# Altium PCB AltiumSTM32_PCB.PcbDoc
Units mm, origin at the board's own origin, x right, y up, seen from the top; angles counter-clockwise.
Board outline 35.25 x 34.25 mm, 4 copper layers (L1 (SIGNAL), L2 (GND), L3 (GND), L4 (SIGNAL)), stack 1.57 mm thick; 35 components, 28 nets, 168 pads, 119 vias.
Unrouted connection lines stored in the file: 10.
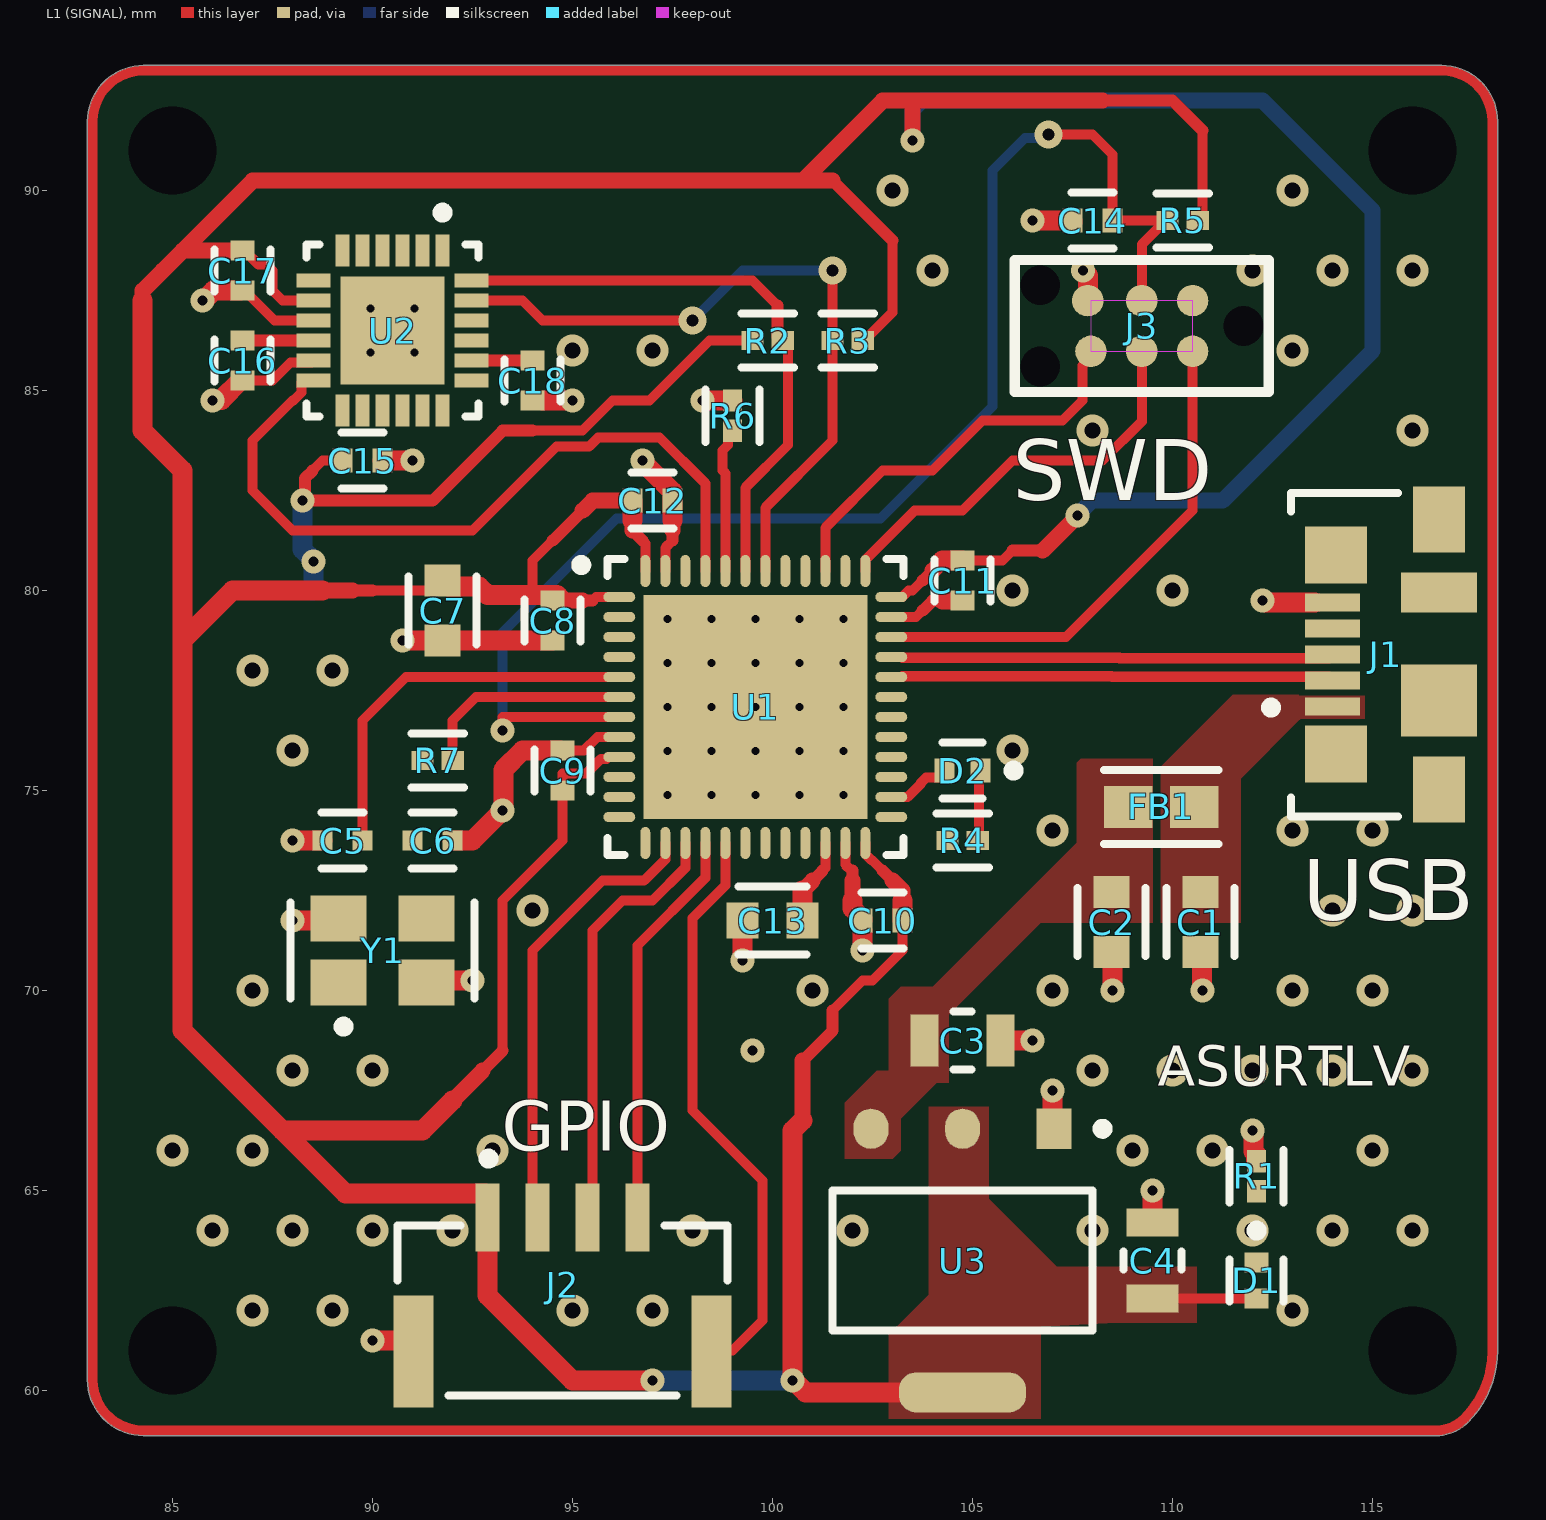
[diagram p0: L1 (SIGNAL) view]
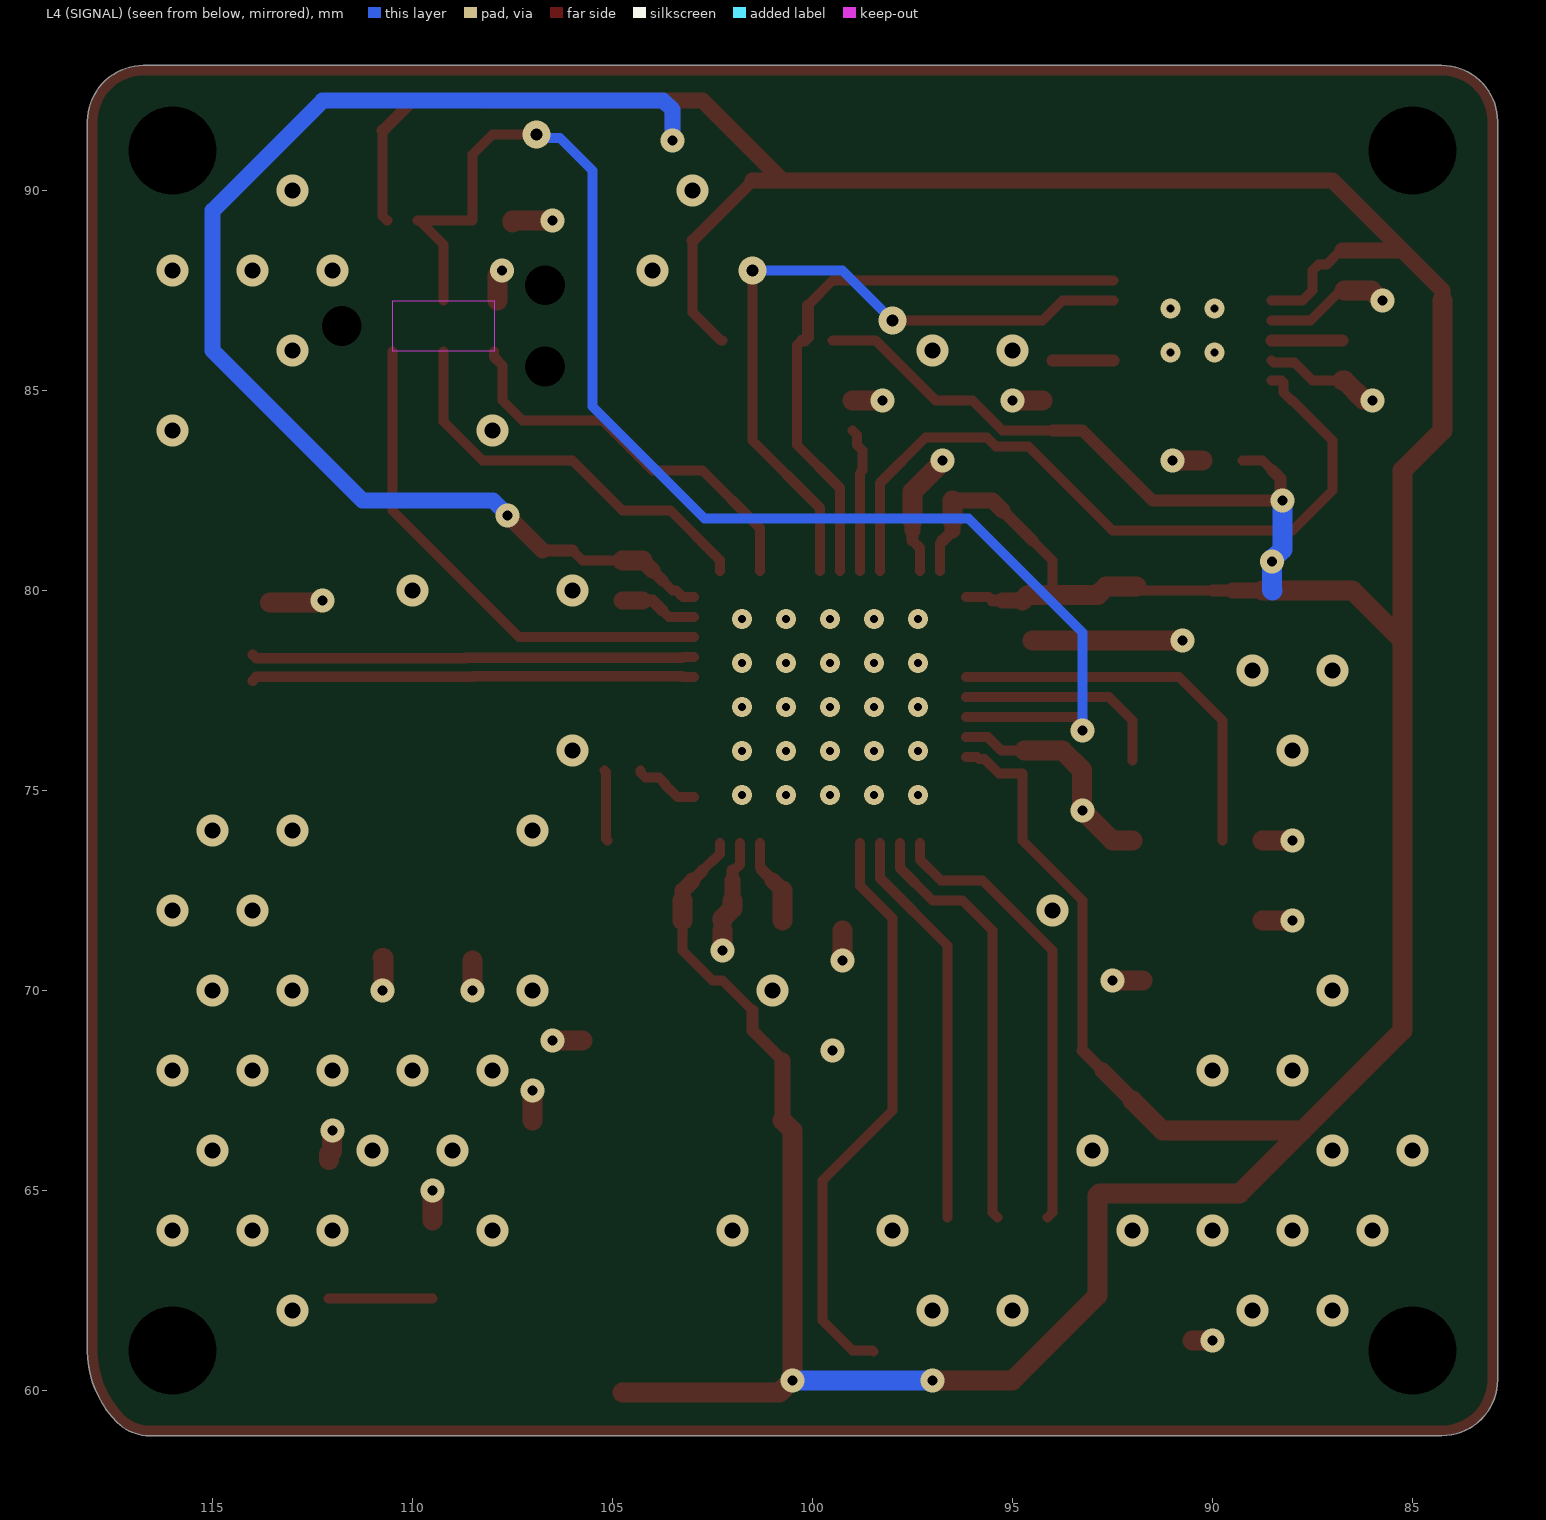
[diagram p1: L4 (SIGNAL) view, seen from below]
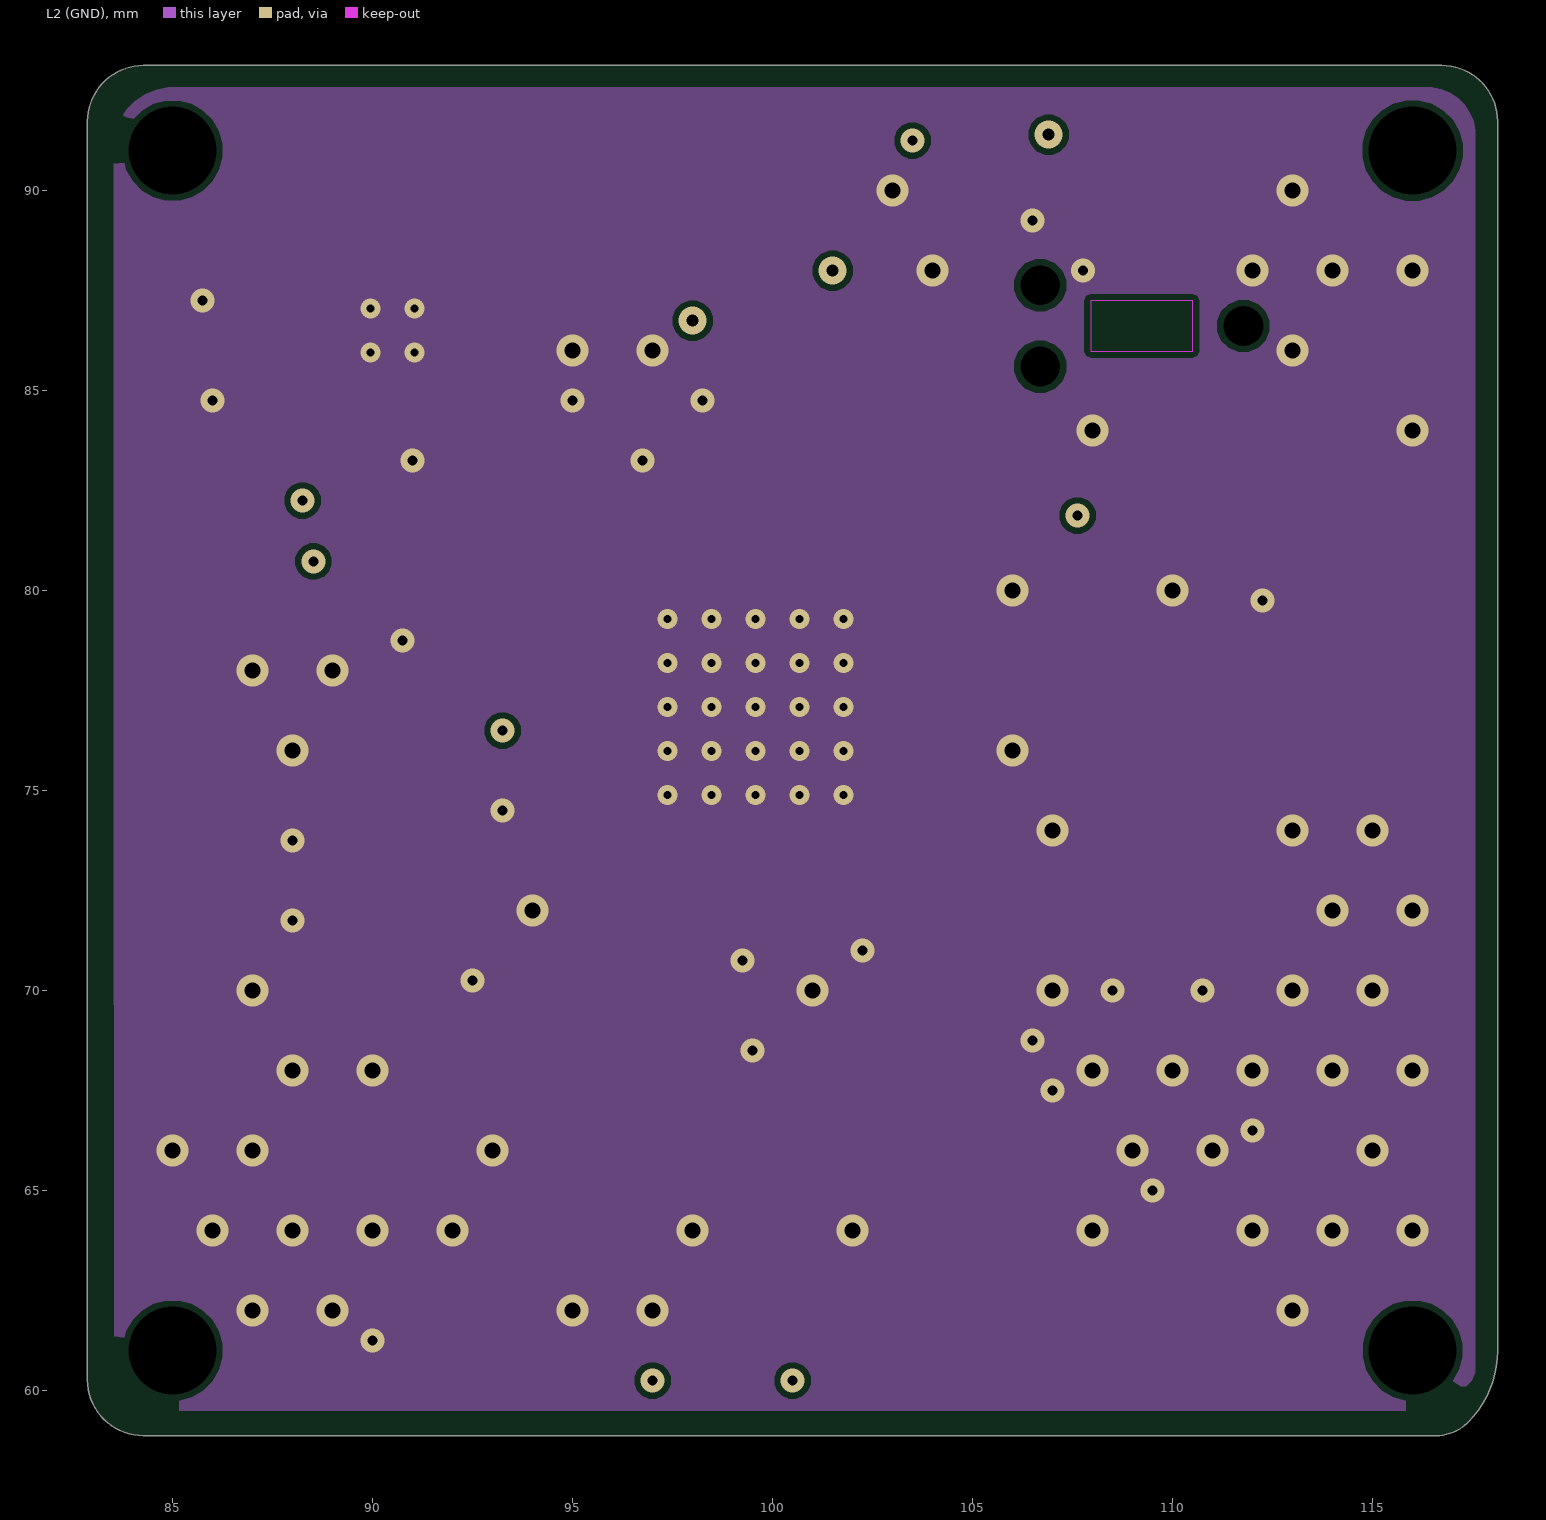
[diagram p2: L2 (GND)]
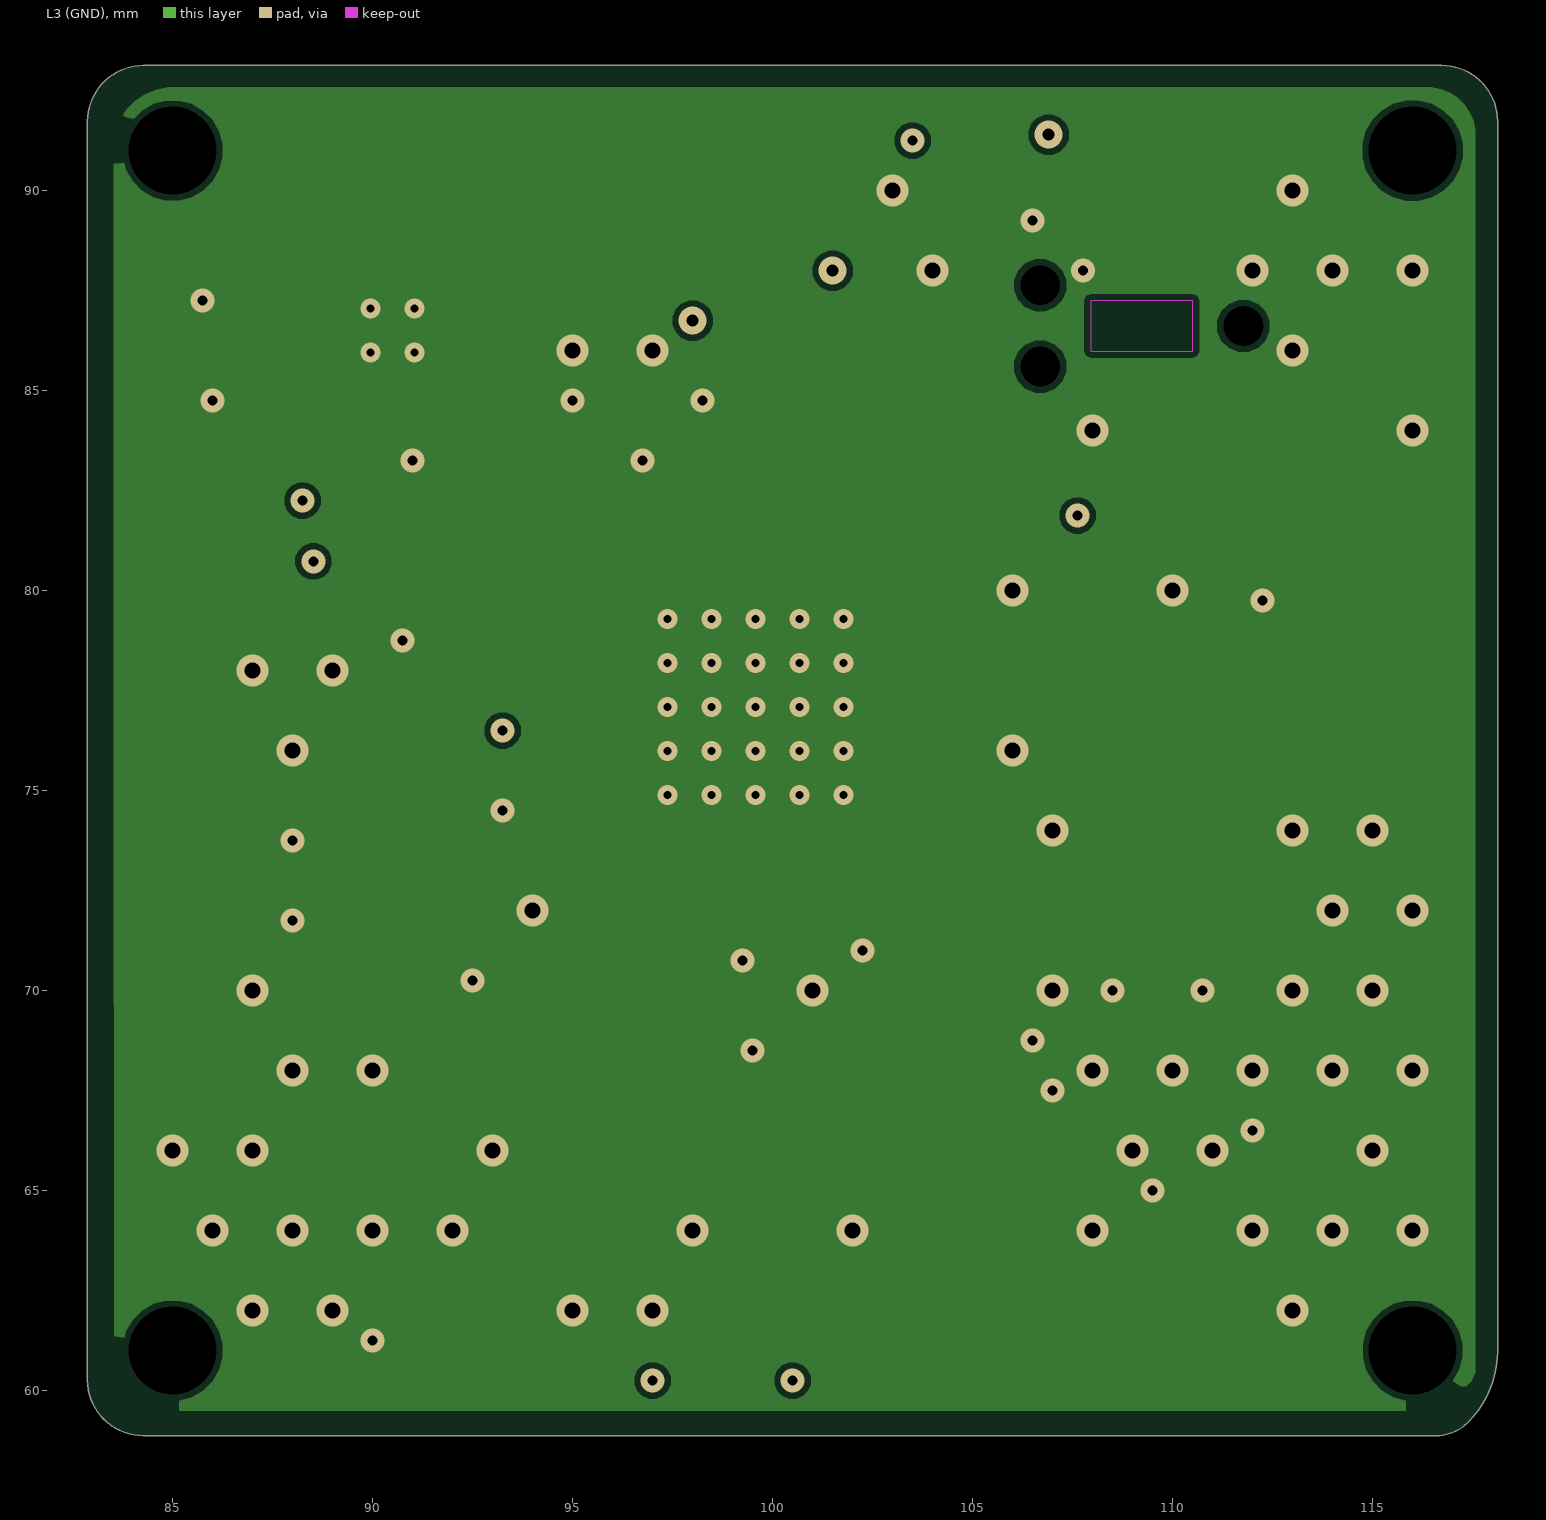
[diagram p3: L3 (GND)]
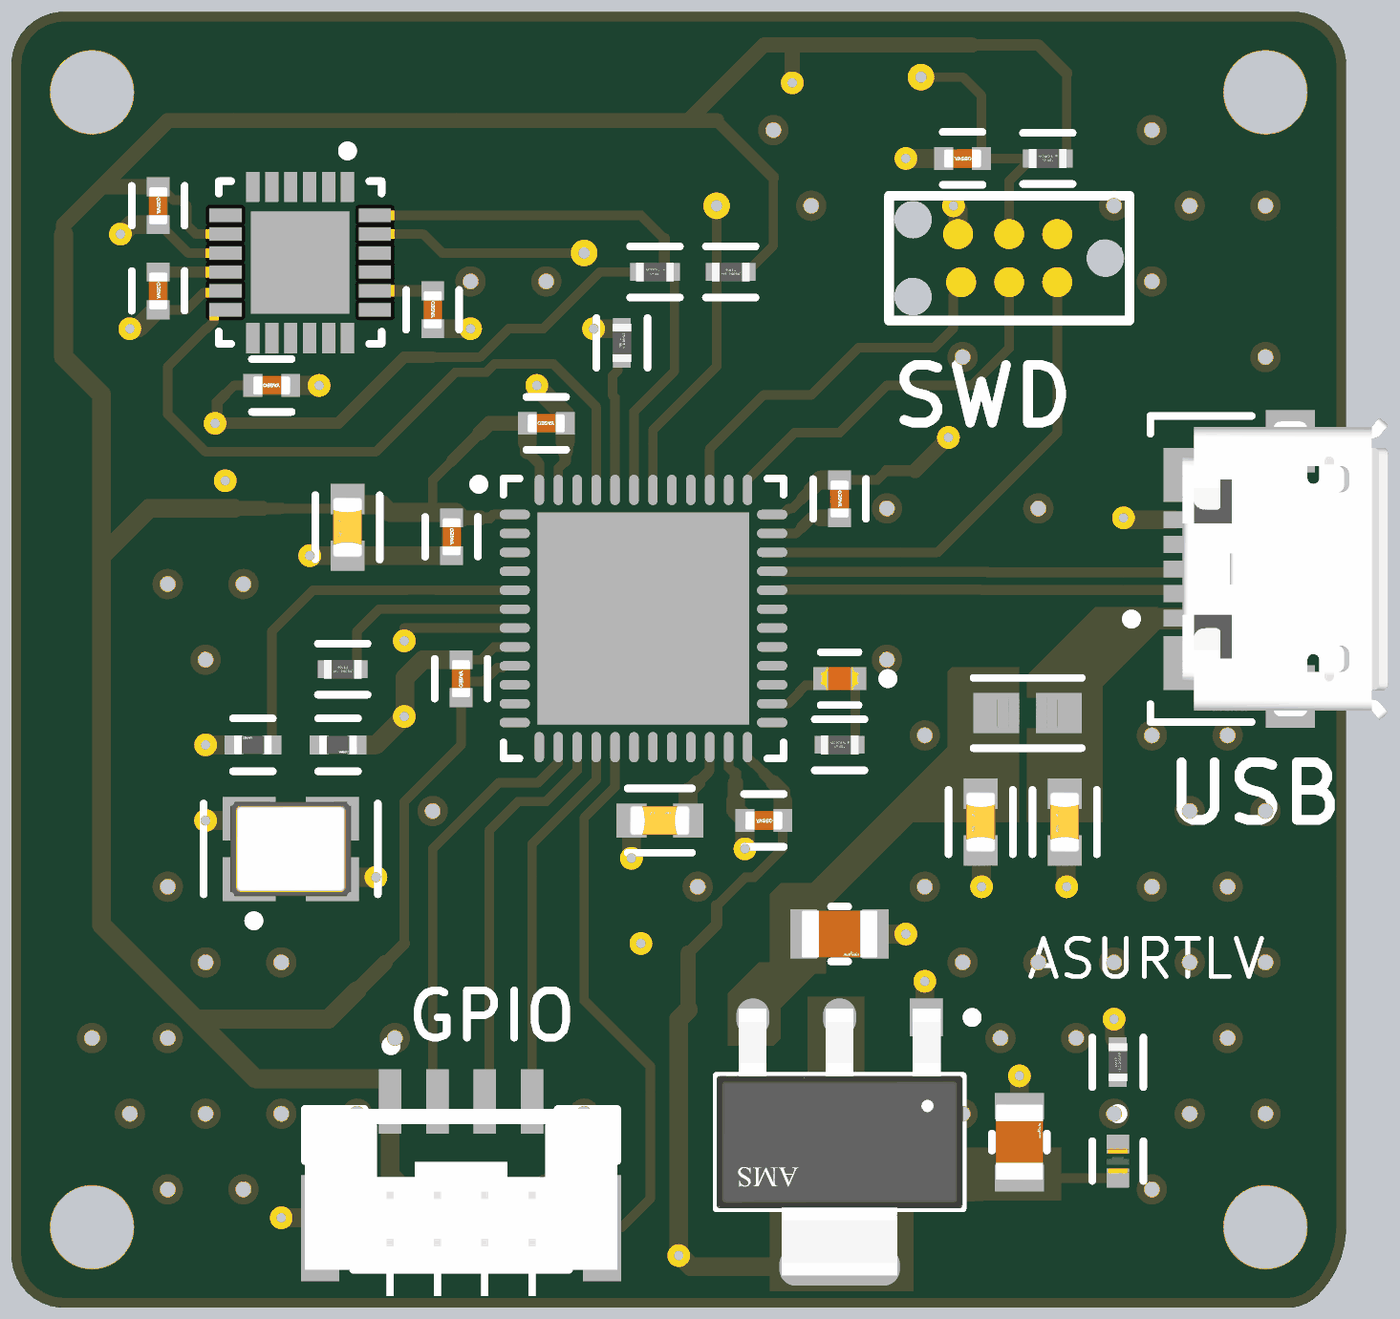
[diagram p4: 3D render of the assembled board from above, using the file's embedded part models]

## Layer stack, top to bottom
Top Solder: solder mask 0.0254, SM-001, Dk 4
L1 (SIGNAL): signal copper 0.035
Dielectric 1: prepreg 0.2, PP-017, Dk 4.6
L2 (GND): signal copper 0.0175
Dielectric 3: core 1.065, Core-039, Dk 4.6
L3 (GND): signal copper 0.0175
Dielectric 5: prepreg 0.2, PP-017, Dk 4.6
L4 (SIGNAL): signal copper 0.035
Bottom Solder: solder mask 0.0254, SM-001, Dk 4

## Board outline
82.873,60.27 82.873,91.73 cw(c84.27,91.73) 84.27,93.127 85,93.127 85.001,93.127 116,93.127 116.73,93.127 cw(c116.73,91.73) 118.127,91.73 118.127,61 cw(c115.586,61) 117.383,59.203 cw(c116.586,60) 116.586,58.873 84.27,58.873 84.269,58.873 cw(c84.27,60.27)

## Design rules (kind name [scope] priority, off if disabled: settings)
Clearance [All] p1: gap=0.15 ignorepadtopadclearanceinfootprint=FALSE
DiffPairsRouting [All] p1: maxlimit=0.254 minlimit=0.203 mostfreqgap=0.254 toplayer_maxgap=0.203 toplayer_prefgap=0.203 toplayer_minwidth=0.26 toplayer_maxwidth=0.26 toplayer_prefwidth=0.26 bottomlayer_maxgap=0.203 bottomlayer_prefgap=0.203 bottomlayer_minwidth=0.26 bottomlayer_maxwidth=0.26 bottomlayer_prefwidth=0.26 impedanceprofiledriven=TRUE impedanceprofileid={91940707-6BF8-4141-95DC-8DDD4F4BC59A} impedanceprofilevalue=90.000000 maxuncoupledlength=12.7
PolygonConnect [All] p1: connectstyle=Direct reliefconductorwidth=0.254 reliefentries=4 polygonreliefangle="90 Angle" airgapwidth=0.254
RoutingVias [All] p1: holewidth=0.3 width=0.7 viastyle="Through Hole" minholewidth=0.25 minwidth=0.55 maxholewidth=0.4 maxwidth=0.9
SolderMaskExpansion [All] p1: expansion=0 istentingtop=FALSE
SupplyNets "Schematic Supply Nets_4" [InNet('3V3')] p1: voltage=0.000
SupplyNets "Schematic Supply Nets_3" [InNet('VBUS')] p2: voltage=0.000
SupplyNets "Schematic Supply Nets_2" [InNet('+3V3')] p3: voltage=0.000
SupplyNets "Schematic Supply Nets_1" [InNet('GND')] p4: voltage=0.000
SupplyNets "Schematic Supply Nets" [InNet('+5V')] p5: voltage=0.000
UnRoutedNet [All] p1: checkbadconnections=TRUE
Width [All] p1: maxlimit=1 minlimit=0.2 preferedwidth=0.3 midlayer1_minwidth=0.254 midlayer1_maxwidth=0.254 midlayer1_prefwidth=0.254 midlayer2_minwidth=0.254 midlayer2_maxwidth=0.254 midlayer2_prefwidth=0.254 minimp=50.000000 maximp=50.000000 favimp=50.000000
28 further rules are at their usual default settings.

## Classes and differential pairs
differential pair class DIFF_USB: USB_D
differential pair USB_D: +USB_D_P -USB_D_N

## Components (designator, comment, footprint, x,y, rotation, side; value= is the part's Value field where it differs from the comment)
C1 "2u2" FP-CC0603-DA-MFG 110.696,71.709 r270 top value="2.2 uF"
C2 "2u2" FP-CC0603-DA-MFG 108.477,71.709 r270 top value="2.2 uF"
C3 "22u" FP-GRT21B-0_2-MFG 104.75,68.75 r0 top
C4 "22u" FP-GRT21B-0_2-MFG 109.5,63.25 r90 top
C5 "8p" FP-CC0402-MFG 89.25,73.75 r180 top value=8pF
C6 "8p" FP-CC0402-MFG 91.5,73.75 r0 top value=8pF
C7 "2u2" FP-CC0603-DA-MFG 91.75,79.5 r270 top value="2.2 uF"
C8 "100n" FP-CC0402-0_05-0_55-L2_0-MFG 94.5,79.25 r90 top
C9 "100n" FP-CC0402-0_05-0_55-L2_0-MFG 94.75,75.5 r270 top
C10 "100n" FP-CC0402-0_05-0_55-L2_0-MFG 102.75,71.75 r0 top
C11 "100n" FP-CC0402-0_05-0_55-L2_0-MFG 104.75,80.25 r90 top
C12 "100n" FP-CC0402-0_05-0_55-L2_0-MFG 97,82.25 r180 top
C13 "2u2" FP-CC0603-DA-MFG 100,71.75 r180 top value="2.2 uF"
C14 "100n" FP-CC0402-0_05-0_55-L2_0-MFG 108,89.25 r0 top
C15 "100n" FP-CC0402-0_05-0_55-L2_0-MFG 89.75,83.25 r180 top
C16 "100n" FP-CC0402-0_05-0_55-L2_0-MFG 86.75,85.75 r90 top
C17 "10n" FP-CC0402-0_05-0_55-L2_0-MFG 86.75,88 r90 top
C18 "2n2" FP-CC0402-0_05-0_55-L2_0-MFG 94,85.25 r90 top
D1 "GREEN" FP-SML-P1-MFG 112.1,62.75 r270 top
D2 "RED" FP-SML-P1-MFG 104.75,75.5 r180 top
FB1 "120R" FP-MPZ1608-0_6-IPC_A 109.717,74.591 r180 top
J1 "473460001" FP-473460001-MFG 116.31,78.4 r90 top
J2 "BM04B-GHS-TBT(LF)(SN)" FP-BM04B-GHS-TBT_LF_SN-MFG 94.75,62 r180 top
J3 "TC2030-IDC-NL" TC2030-IDC-NL 111.77,86.615 r180 top
R1 "1k" FP-CRGCQ0402-IPC_C 112.1,65.36 r90 top value=10KΩ
R2 "2k2" FP-CRGCQ0402-IPC_C 99.874,86.25 r180 top value=10KΩ
R3 "2k2" FP-CRGCQ0402-IPC_C 101.874,86.25 r0 top value=10KΩ
R4 "1k" FP-CRGCQ0402-IPC_C 104.75,73.75 r180 top value=10KΩ
R5 "10k" FP-CRGCQ0402-IPC_C 110.25,89.25 r180 top value=10KΩ
R6 "10k" FP-CRGCQ0402-IPC_C 99,84.376 r90 top value=10KΩ
R7 "0R" FP-CRGCQ0402-IPC_C 91.624,75.75 r0 top value=10KΩ
U1 "STM32F411CEU6" STM-UFQFPN48_L 99.568,77.089 r0 top
U2 "MPU-6050" IS-QFN-24_V 90.5,86.5 r270 top
U3 "AMS1117-3.3" FP-AMS1117-IPC_C 104.75,63.25 r270 top
Y1 "24MHz" FP-TSX-3225-MFG 90.25,71 r0 top

## Footprints (in the part's own frame and the unit in brackets; to place one, negate y for a bottom-side part, rotate by r counter-clockwise, add the part's x,y. Pads: shape width x height; smd on the part's side, far side on the other; paste and mask are expansions set on the pad)
FP-473460001-MFG [mm]
  rect 0.45x1.38 smd paste+0 mask+0: 1(-1.3,2.31) 2(-0.65,2.31) 3(0,2.31) 4(0.65,2.31) 5(1.3,2.31)
  rect 1.425x1.55 smd paste+0 mask+0: 6(-2.488,2.225) 7(2.488,2.225)
  rect 1.65x1.3 smd paste+0 mask+0: 8(-3.375,-0.35) 11(3.375,-0.35)
  rect 1.8x1.9 smd paste+0 mask+0: 9(-1.15,-0.35)
  rect 1x1.9 smd paste+0 mask+0: 10(1.55,-0.35)
  silkscreen extent -4.05,0.67 4.05,3.97, body extent -4.3,-2.48 4.3,3.45, height 0.25
FP-AMS1117-IPC_C [mm]
  rect 1.004x0.872 smd paste+0 mask+0: 1(-3.295,2.29)
  rrect100% 1.004x0.872 smd paste+0 mask+0: 2(-3.295,0) 3(-3.295,-2.29)
  rrect87% 1.004x3.182 smd paste+0 mask+0: 4(3.295,0)
  silkscreen extent -3.42,-3.25 1.75,3.63, body extent -3.9,-3.35 3.9,3.35, height 0.25
FP-BM04B-GHS-TBT_LF_SN-MFG [mm]
  rect 0.6x1.7 smd paste+0 mask+0: 1(1.875,-2.325) 2(0.625,-2.325) 3(-0.625,-2.325) 4(-1.875,-2.325)
  rect 1x2.8 smd paste+0 mask+0: 5(-3.725,1.025) 6(3.725,1.025)
  silkscreen extent -4.13,-3.92 4.13,2.12, body extent -4.13,-2.12 4.13,2.83, height 4.2
FP-CC0402-0_05-0_55-L2_0-MFG [mm]
  rect 0.5x0.6 smd paste+0 mask+0: 1(-0.5,0) 2(0.5,0)
  silkscreen extent -0.53,-0.7 0.53,0.7, body extent -0.85,-0.4 0.85,0.4, height 0.25
FP-CC0402-MFG [mm]
  rect 0.5x0.5 smd paste+0 mask+0: 1(-0.5,0) 2(0.5,0)
  silkscreen extent -0.53,-0.7 0.53,0.7, body extent -0.87,-0.48 0.87,0.48, height 0.25
FP-CC0603-DA-MFG [mm]
  rect 0.8x0.9 smd paste+0 mask+0: 1(-0.75,0) 2(0.75,0)
  silkscreen extent -0.85,-0.85 0.85,0.85, body extent -1.35,-0.75 1.35,0.75, height 0.25
FP-CRGCQ0402-IPC_C [mm]
  rect 0.56x0.472 smd paste+0 mask+0: 1(-0.376,0) 2(0.376,0)
  silkscreen extent -0.66,-0.67 0.66,0.67, body extent -0.76,-0.38 0.76,0.38, height 0.25
FP-GRT21B-0_2-MFG [mm]
  rect 0.7x1.3 smd paste+0 mask+0: 1(-0.95,0) 2(0.95,0)
  silkscreen extent -0.23,-0.72 0.23,0.72, body extent -1.4,-0.82 1.4,0.82, height 0.25
FP-MPZ1608-0_6-IPC_A [mm]
  rect 1.206x1.058 smd paste+0 mask+0: 1(-0.826,0) 2(0.826,0)
  silkscreen extent -1.43,-0.93 1.43,0.93, body extent -1.93,-1.03 1.93,1.03, height 0.25
FP-SML-P1-MFG [mm]
  rect 0.5x0.6 smd paste+0 mask+0: 1(-0.45,0) 2(0.45,0)
  silkscreen extent -1.37,-0.67 0.53,0.67, body extent -0.8,-0.43 0.8,0.43, height 0.25
FP-TSX-3225-MFG [mm]
  rect 1.4x1.15 smd paste+0 mask+0: 1(-1.1,-0.8) 2(1.1,-0.8) 3(1.1,0.8) 4(-1.1,0.8)
  silkscreen extent -2.3,-2.02 2.3,1.2, body extent -1.9,-1.48 1.9,1.48, height 0.25
IS-QFN-24_V [mm] "QFN, 24-Leads, Body 4x4mm, Pitch 0.5mm, Thermal Pad 2.7x2.6mm"
  rect 0.8x0.35 smd: 1(-2,1.25) 2(-2,0.75) 3(-2,0.25) 4(-2,-0.25) 5(-2,-0.75) 6(-2,-1.25) 13(2,-1.25) 14(2,-0.75) 15(2,-0.25) 16(2,0.25) 17(2,0.75) 18(2,1.25)
  rect 0.35x0.85 smd mask+0.102: 7(-1.25,-1.975) 8(-0.75,-1.975) 9(-0.25,-1.975) 10(0.25,-1.975) 11(0.75,-1.975) 12(1.25,-1.975) 19(1.25,1.975) 20(0.75,1.975) 21(0.25,1.975) 22(-0.25,1.975) 23(-0.75,1.975) 24(-1.25,1.975)
  rect 2.7x2.6 smd: 25(0,0)
  silkscreen extent -3.07,-2.15 2.15,2.15, body extent -2,-2 2,2, height 0.95
STM-UFQFPN48_L [mm] "QFN, 48-Leads, Body 7.1x7.1mm, Pitch 0.5mm, Thermal Pad 5.6x5.6mm, IPC High Density"
  oval 0.8x0.25 smd: 1(-3.4,2.75) 2(-3.4,2.25) 3(-3.4,1.75) 4(-3.4,1.25) 5(-3.4,0.75) 6(-3.4,0.25) 7(-3.4,-0.25) 8(-3.4,-0.75) 9(-3.4,-1.25) 10(-3.4,-1.75) 11(-3.4,-2.25) 12(-3.4,-2.75) 25(3.4,-2.75) 26(3.4,-2.25) 27(3.4,-1.75) 28(3.4,-1.25) 29(3.4,-0.75) 30(3.4,-0.25) 31(3.4,0.25) 32(3.4,0.75) 33(3.4,1.25) 34(3.4,1.75) 35(3.4,2.25) 36(3.4,2.75)
  oval 0.25x0.8 smd: 13(-2.75,-3.4) 14(-2.25,-3.4) 15(-1.75,-3.4) 16(-1.25,-3.4) 17(-0.75,-3.4) 18(-0.25,-3.4) 19(0.25,-3.4) 20(0.75,-3.4) 21(1.25,-3.4) 22(1.75,-3.4) 23(2.25,-3.4) 24(2.75,-3.4) 37(2.75,3.4) 38(2.25,3.4) 39(1.75,3.4) 40(1.25,3.4) 41(0.75,3.4) 42(0.25,3.4) 43(-0.25,3.4) 44(-0.75,3.4) 45(-1.25,3.4) 46(-1.75,3.4) 47(-2.25,3.4) 48(-2.75,3.4)
  rect 5.6x5.6 smd: 49(0,0)
  silkscreen extent -4.47,-3.7 3.7,3.7, body extent -3.55,-3.55 3.55,3.55, height 0.6
TC2030-IDC-NL [mm] "Tag-Connect 6-Pin with No Legs (PN# TC2030-IDC-NL)"
  round 0.9 hole 0.995 unplated: 0(0,0) 0(5.08,-1.016) 0(5.08,1.016)
  round 0.79 smd paste-0.39: 1(1.27,-0.635) 2(1.27,0.635) 3(2.54,-0.635) 4(2.54,0.635) 5(3.89,-0.635) 6(3.81,0.635)
  Keep-Out Layer region: 1.27,-0.635 3.81,-0.635 3.81,0.635 1.27,0.635
  silkscreen extent -0.64,-1.65 5.71,1.65

## Part data
C1 C2 C7 C13: library part CMP-03422-001238-1, "CAP CER 2.2UF 16V X7R 0603", Capacitance="2.2 uF", Manufacturer=YAGEO, Manufacturer Part Number=CC0603KRX7R7BB225, Package=CC0603-DA, Temperature="-55°C to +125°C", Temperature Characteristic=X7R, Temperature Coefficient=15%, Temperature Range High=+125°C, Temperature Range Low=-55°C, Tolerance=0.1, Voltage="16 V", Automotive=No, Category=Cap, ComponentLink2Description=Datasheet, ComponentLink2URL=http://www.yageo.com/documents/recent/UPY-GPHC_X7R_6.3V-to-50V_18.pdf, Device Class L1="Passive Components", Device Class L2=Capacitors, Device Class L3="Ceramic Capacitors", Digikey Description="CAP CER 2.2UF 16V X7R 0603", Footprint Url=http://www.yageo.com/exep/pages/download/literatures/UPY-C_GEN_24.pdf, Height=0.9mm, Lead Free=Yes, Material=Ceramic, Mouser Description="Cap Ceramic 2.2uF 16V X7R 10% Pad SMD 0603 125C Automotive T/R", Octopart=https://octopart.com/cc0603krx7r7bb225-yageo-67146440, RoHS=TRUE, Voltage Rating="16 V"
C3 C4: library part CMP-06035-049382-1, "Multi-Layer Ceramic Capacitor 22uF 16V X5R ±20% 0805 Emboss T/R", Capacitance=22uF, Case Code (Imperial)=0805, Case Code (Metric)=2012, Max Operating Temperature=85°C, Min Operating Temperature=-55°C, Ratings=AEC-Q200, Tolerance=20%, Voltage Rating=16V, Case/Package=0805, Length=0.079inch, Mount="Surface Mount", Packaging="Tape and Reel", Thickness=0.057inch, Width=0.049inch
C5 C6: library part CMP-03422-000060-1, "CAP CER 8PF 50V NPO 0402", Capacitance=8pF, Manufacturer=Yageo, Manufacturer Part Number=CC0402BRNPO9BN8R0, Package=CC0402, Temperature="-55°C to +125°C", Temperature Characteristic=NP0, Temperature Coefficient=30ppm/°C, Temperature Range High=+125°C, Temperature Range Low=-55°C, Tolerance=0.1pF, Voltage Rating=50V, Automotive=No, Category=Cap, ComponentLink2Description=Datasheet, ComponentLink2URL=https://www.yageo.com/upload/media/product/productsearch/datasheet/mlcc/UPY-GP_NP0_16V-to-50V_18.pdf, Device Class L1="Passive Components", Device Class L2=Capacitors, Device Class L3="Ceramic Capacitors", Digikey Description="CAP CER 8PF 50V NPO 0402", Footprint Url=https://www.yageo.com/upload/website/yageo_UPY-C_GEN_24_19050911_476.pdf, Height=0.55mm, Ipc Land Pattern Name=CAPC10050X50, Lead Free=Yes, Material=Ceramic, Mouser Description="Multilayer Ceramic Capacitors MLCC - SMD/SMT 8.0pF 50V NPO 0.1pF", Octopart=https://octopart.com/cc0402brnpo9bn8r0-yageo-47310167, RoHS=TRUE
C8 C9 C10 C11 C12 C14 C15 C16 C17 C18: library part CMP-03422-001485-1, "CAP CER 0.1UF 16V X7R 0402", Capacitance=100nF, Case Code (Imperial)=0402, Case Code (Metric)=1005, Dielectric=X7R, Max Operating Temperature=125°C, Min Operating Temperature=-55°C, Package Quantity=10000, Resistor Type=Ceramic, Tolerance=5%, Voltage Rating=16V, Case/Package=0402, Construction=Flat, Depth=0.5mm, Halogen Free="Halogen Free", Height=0.5mm, Lead Free="Lead Free", Length=1mm, Mount="Surface Mount", Packaging="Tape and Reel", Radiation Hardening=No, RoHS Compliant=Yes, Series=CC, Thickness=0.022inch, Voltage Rating (DC)=16V, Width=0.02inch
D1: library part CMP-08952-000015-1, "LED GREEN CLEAR 1006 SMD", Colour=Green, Forward Current=20mA, Forward Voltage=2.1V, Manufacturer=Rohm, Manufacturer Part Number=SML-P13PTT86R, Package=SML-P1, Power Dissipation=52mW, Reverse Voltage=5V, Temperature="-40°C to +85°C", Temperature Range High=+85°C, Temperature Range Low=-40°C, Automotive=No, Category=Diode, ComponentLink2Description=Datasheet, ComponentLink2URL=https://d1d2qsbl8m0m72.cloudfront.net/en/products/databook/datasheet/opto/led/chip_mono/sml-p1-e.pdf, Device Class L1=Optoelectronics, Device Class L2=LEDs, Device Class L3=unset, Digikey Description="LED GREEN CLEAR 1006 SMD", Height=0.25mm, Lead Free=Yes, Led Orientation="Top View", Luminous Intensity=10mcd, Mouser Description="LED Uni-Color Green 2-Pin Chip 0402(1006Metric) T/R", Octopart=https://octopart.com/sml-p13ptt86r-rohm-59370256, RoHS=TRUE, Wavelength=560nm
D2: library part CMP-08952-000002-1, "LED RED CLEAR 0402 SMD", Colour=Red, Forward Current=20mA, Forward Voltage=2V, Manufacturer=Rohm, Manufacturer Part Number=SML-P12VTT86R, Package=SML-P1, Power Dissipation=50mW, Reverse Voltage=5V, Temperature="-40°C to +85°C", Temperature Range High=+85°C, Temperature Range Low=-40°C, Automotive=No, Category=Diode, ComponentLink2Description=Datasheet, ComponentLink2URL=https://www.rohm.com/datasheet/SML-P12VT(R)/sml-p1-e, Device Class L1=Optoelectronics, Device Class L2=LEDs, Device Class L3=unset, Digikey Description="LED RED CLEAR 0402 SMD", Height=0.25mm, Lead Free=Yes, Led Orientation="Top View", Luminous Intensity=60mcd, Mouser Description="SML-P1 Series Red 0402 Clear 60 mcd 2V Surface Mount PICOLED? LED", Octopart=https://octopart.com/sml-p12vtt86r-rohm-34112315, RoHS=TRUE, Wavelength=630nm
FB1: library part CMP-08257-000019-1, "FERRITE BEAD 120 OHM 0603 1LN", Case Code (Imperial)=0603, Case Code (Metric)=1608, DC Resistance (DCR)=45mR, Max Current Rating=2A, Max Operating Temperature=125°C, Min Operating Temperature=-55°C, Package Quantity=4000, Ratings=AEC-Q200, Test Frequency=100MHz, Tolerance=25%, Case/Package=0603, Height=0.03inch, Impedance=120R, Length=0.063inch, Max DC Current=2A, Mount="Surface Mount", Number of Lines=1, Packaging="Tape and Reel", RoHS Compliant=Yes, Termination=SMD/SMT, Weight=7.1E-05oz, Width=0.031inch
J1: library part CMP-2000-05246-2, "CONN RCPT USB2.0 MICRO B SMD R/A", Current Rating=1.8A, Manufacturer=Molex, Package=0, Temperature="-30°C to +85°C", Temperature Range High=+85°C, Temperature Range Low=-30°C, Voltage Rating=30V, Automotive=No, Category=Conn, ComponentLink2Description=Datasheet, ComponentLink2URL=https://www.molex.com/webdocs/datasheets/pdf/en-us/0473460001_IO_CONNECTORS.pdf, Conn Orientation="Right Angle", Contact Material=Gold,Nickel, Device Class L1=Connectors, Device Class L2="USB Connectors", Device Class L3=unset, Digikey Description="CONN RCPT USB2.0 MICRO B SMD R/A", Footprint Url=https://www.molex.com/pdm_docs/sd/473460001_sd.pdf, Height=2.945mm, Is Female=yes, Lead Free=Yes, Manufacturer Part Number=473460001, Number Of Contacts=5, Octopart=https://octopart.com/47346-0001-molex-7164928, Pitch=0.65mm, RoHS=TRUE, Shielding=true, Usb Standard="USB 2.0"
J2: library part CMP-17439-000062-2, "CONN HEADER SMD 4POS 1.25MM", Case/Package=SMD/SMT, Current Rating=1A, Housing Color=Natural, Max Operating Temperature=85°C, Min Operating Temperature=-25°C, Voltage Rating=50V, Contact Material=Bronze, Contact Plating=Tin, Gender=Male, Housing Material=Nylon, Lead Free="Lead Free", Number Of Contacts=4, Number of Positions=4, Number of Rows=4, Orientation=Straight, Packaging="Cut Tape", Pitch=1.25mm, REACH SVHC="No SVHC", Series=GH, Termination=Crimp, Voltage Rating (AC)=50V, Wire/Cable Gauge=26AWG
J3: library part CMP-003-000003-1, "CABLE ADAPTER 6 POS", Package=None, Availability=Unavailable, Component Type=Standard, Design Item ID=TC2030-IDC-NL, MP=TC2030-IDC-NL, Pin Count=6, Price=None, Source=TC2030-IDC-NL.SchLib
R1 R2 R3 R4 R5 R6 R7: library part CMP-03211-011107-1, "CRGCQ 0402 10K 1%", Ambient Temperature Range High=+70°C, Manufacturer="TE Connectivity", Manufacturer Part Number=CRGCQ0402F10K, Package=CRGCQ0402, Power Rating=0.0625W, Resistance=10KΩ, Temperature="-55°C to +155°C", Temperature Coefficient=±100ppm/°C, Temperature Range High=+155°C, Temperature Range Low=-55°C, Tolerance=0.01, Voltage Rating=50V, Automotive=Yes, Category=Res, ComponentLink2Description=Datasheet, ComponentLink2URL=https://www.te.com/commerce/DocumentDelivery/DDEController?Action=showdoc&DocId=Data+Sheet%7F1773204-3%7F1%7Fpdf%7FEnglish%7FENG_DS_1773204-3_1.pdf%7F4-2176347-922, Composition="Thick Film", Device Class L1="Passive Components", Device Class L2=Resistors, Device Class L3="Chip SMD Resistors", Digikey Description="CRGCQ 0402 10K 1%", Height=0.4mm, Ipc Land Pattern Name=RESC10050X35, Lead Free=Yes, Mouser Description="Res Thick Film 0402 10K Ohm 1% 0.063W(1/16W) ±100ppm/C Pad SMD Automotive T/R", Octopart=https://octopart.com/crgcq0402f10k-te+connectivity-91017932, RoHS=TRUE, Series=CRGCQ
U1: library part CMP-0243-00165-1, "ARM Cortex-M4 32-bit MCU+FPU, 512 KB Flash, 128 KB RAM, 36 I/Os, 48-Pin UFQFPN, -40 to 85 degC, Tray", I/Os (High Current)=36, Operating Frequency(F) (Processor speed) (MHz)=100, Package Description=UFQFPN48, Package Reference="48-Pin Ultra Thin Fine Pitch Quad Flat No-Lead, 7 x 7 x 0.6 mm Body, 0.5 mm Pitch, Exposed Pad", Supply Voltage(Vcc) min (V)=1.7, ComponentLink1Description="Manufacturer URL", ComponentLink1URL=http://www.st.com/, ComponentLink2Description=Datasheet, ComponentLink2URL=http://www.st.com/st-web-ui/static/active/en/resource/technical/document/datasheet/DM00115249.pdf, Core="ARM Cortex-M4", DatasheetVersion="Rev. 6", FLASH Size (Prog) (kB)=512, Internal RAM Size (kB)=128, Mounting Technology="Surface Mount", Packing=Tray
U2: library part CMP-1753-00002-2, "3-Axis Gyroscope, Accelerometer and a Digital Motion Processor(TM) (DMP), 2.375 to 3.46 V, -40 to 85 degC, 24-Pin QFN, RoHS, Tape and Reel", Manufacturer=InvenSense, Standard Package=5,000, Category=Sensors,Transducers, Datasheet URL=http://datasheet.octopart.com/MPU-6050-InvenSense-datasheet-14421344.pdf, Datasheet Version="Rev. 3.3, 05/2012", Dynamic Catalog=MPU-6000™Series, Family=Multifunction, Featured Product=MPU-60506-Axis,IntegratedI²CSolution, Manufacturer URL=http://www.invensense.com/, Online Catalog=MPU-6000™Series, Other Names="1428-1007-2 / MPU6050", Output Type=Digital, Sensor Type=MotionTracking, Unit PriceUSD=Digital
U3: library part CMP-209535-000001-1, "LDO Voltage Regulators 1A, 3.3V", Dropout Voltage=1.1V, Manufacturer="Advanced Monolithic Systems", Max Junction Temp=+125°C, Max Power Dissipation=1.2W, Max Supply Voltage=15V, Nominal Supply Current=5mA, Output Current=1A, Output Voltage=3.3V, Package=AMS1117, Temperature="-40°C to +125°C", Temperature Range Low=-40°C, Automotive=No, Category=IC, ComponentLink2Description=Datasheet, ComponentLink2URL=http://www.advanced-monolithic.com/pdf/ds1117.pdf, Device Class L1="Integrated Circuits (ICs)", Device Class L2="Power Management ICs", Device Class L3="Voltage Regulators - Linear", Height=1.8mm, Ipc Land Pattern Name=SOT229P700X180-4, Lead Free=Yes, Manufacturer Part Number=AMS1117-3.3, Number Of Outputs=1, Octopart=https://octopart.com/ams1117-3.3-advanced+monolithic+systems-25899300, Output Type=Fixed, RoHS=TRUE, Standoff Height=0.64mm, Temperature Range High=+125°C
Y1: library part CMP-36405-000018-1, "CRYSTAL 24.0000MHZ 9PF SMD", Case/Package=SMD/SMT, ESR (Equivalent Series Resistance)=40R, Frequency Stability=20ppm, Frequency Tolerance=10ppm, Load Capacitance=9pF, Max Operating Temperature=105°C, Min Operating Temperature=-40°C, Package Quantity=250, Depth=2.5mm, Drive Level=200uW, Frequency=24MHz, Height=0.024inch, Lead Free="Lead Free", Length=3.2mm, Mount="Surface Mount", Number of Pins=4, Packaging="Tape and Reel", RoHS Compliant=Yes, Series=TSX-3225, Termination=SMD/SMT, Tolerance=10ppm, Weight=0.000564oz, Width=2.5mm

## Free pads (board coordinates)
  round 1.524 hole 2.2: 1(85,61) 1(85,91) 1(116,61) 1(116,91)

## Via types
v1: diameter 0.8, hole 0.4, L1 (SIGNAL) to L4 (SIGNAL), tented both sides, 56 vias
v2: diameter 0.6, hole 0.25, L1 (SIGNAL) to L4 (SIGNAL), 31 vias
v3: diameter 0.5, hole 0.2, L1 (SIGNAL) to L4 (SIGNAL), 29 vias
v4: diameter 0.7, hole 0.3, L1 (SIGNAL) to L4 (SIGNAL), 3 vias

## Nets (pads, with @x,y where several pads share a name; then routed paths per layer and width w, separated by ;. In a path a pad name is that pad's centre, name@x,y a point inside that pad or via, vN(x,y) a via of type N, cw(c..) or ccw(c..) an arc to the next point about the centre after c; other vN are vias at no path point)
3V3: J3.1
+3V3: C4.1 C7.1 C8.2 C9.2 C10.2 C11.2 C12.2 C15.2 C17.2 D1.2 J2.1 R2.2 R3.2 R5.1 U1.1 U1.9 U1.24 U1.36 U1.48 U2.8 U2.13 U3.2 U3.4 | length 184.8
  L1 (SIGNAL) w0.25: C17.2@86.8,88.5 87.154,88.146 87.354,88.146 87.5,88 87.5,87.5 87.75,87.25 U2.8 ; 88.5,83 88.75,83.25 C15.2 ; 90,80 91.8,80 C7.1@91.9,80.1 ; 93.25,68.5 93.25,72.25 94.75,73.75 C9.2 94.75,75.425 95.343,75.425 95.707,75.789 95.843,75.789 95.893,75.839 U1.9 ; 93.918,79.894 94,79.976 94,80.75 94.5,81.25 ; 94,84 95.25,84 96,84.75 96.921,84.75 98.421,86.25 R2.2 ; 95.5,79.75 95.589,79.839 U1.1 ; 96.75,81.25 96.818,81.182 U1.48 ; 101.5,69.5 102.25,70.25 102.5,70.25 103.25,71 C10.2 ; R3.2 102.294,86.25 103,86.956 103,88.75 ; U1.24 102.318,73.414 102.482,73.25 102.5,73.25 102.75,73 ; U1.36 103.243,79.839 103.404,80 103.5,80 103.75,80.25 ; C11.2 105.75,80.75 106,81 ; C4.1 D1.2 ; R5.1 110.639,89.25 110.75,89.361 110.75,91.5
  L1 (SIGNAL) w0.3: 88.5,83 88.307,82.807 88.307,82.307 v2(88.25,82.25) 91.5,82.25 93.25,84 94,84 ; 89.5,80 90,80 ; 92.75,68 93.25,68.5 ; 94.5,81.25 95.25,82 ; 95.25,79.75 95.5,79.75 ; 96.5,81.5 96.75,81.25 ; 100.75,68.25 101.5,69 101.5,69.5 ; 101.5,90.25 103,88.75 ; 102.75,73 103,72.75 ; 103.75,80.25 104,80.5 ; 106,81 106.75,81 ; 108.25,92.25 110,92.25 110.75,91.5
  L1 (SIGNAL) w0.4: 84.25,87.25 84.25,87.5 84.75,88 85.25,88.5 ; C17.2 85.25,88.5 ; 88.75,80 89.5,80 ; 92,67.25 92.75,68 ; C8.2@94.75,79.75 95.25,79.75 ; 95.25,82 95.5,82.25 C12.2 ; 96.5,81.5 96.5,81.75 ; 100.75,66.75 100.75,68.25 ; 101.5,90.25 100.75,90.25 ; 103,72.75 103.25,72.5 103.25,72.25 ; v2(103.5,91.25) 103.5,92.25 ; 104,80.5 104.25,80.75 ; 106.75,81 v2(107.625,81.875) ; 108.25,92.25 103.5,92.25 ; 85.25,88.5 87,90.25 100.75,90.25 ; 100.75,90.25 102.75,92.25 103.5,92.25
  L1 (SIGNAL) w0.5: 84.25,87.25 84.25,84 85.25,83 85.25,78.75 ; 88.75,80 86.5,80 85.25,78.75 ; C7.1@91.9,80.1 92.662,80.1 92.868,79.894 93.918,79.894 94.25,79.894 94.606,79.894 94.65,79.85 C8.2@94.75,79.75 ; 92,67.25 91.25,66.5 87.75,66.5 ; 96.5,81.75 C12.2 ; v2(97,60.25) 95,60.25 92.875,62.375 J2.1 92.875,64.875 92.825,64.925 89.325,64.925 87.75,66.5 ; 100.75,66.75 100.5,66.5 v2(100.5,60.25) 100.527,60.25 100.822,59.955 U3.4 ; C10.2 103.25,72.25 ; 104.25,80.75 C11.2 ; 85.25,78.75 85.25,69 87.75,66.5
  L4 (SIGNAL) w0.4: v2(103.5,91.25) 103.5,92.016 103.734,92.25 112.25,92.25 115,89.5 115,86 111.25,82.25 107.984,82.25 107.625,81.891 v2(107.625,81.875)
  L4 (SIGNAL) w0.5: v2(88.25,82.25) 88.25,81.027 88.519,80.758 88.519,80.019 88.5,80 ; v2(97,60.25) v2(100.5,60.25)
  other v2: 88.519,80.731
+5V: C2.1 C3.1 FB1.2 U3.3
GND: C1.2 C2.2 C3.2 C4.2 C5.2 C6.2 C7.2 C8.1 C9.1 C10.1 C11.1 C12.1 C13.2 C14.1 C15.1 C16.1 C17.1 C18.1 J1.5 J2.6 J3.5 R1.2 R4.2 R6.2 U1.8 U1.23 U1.35 U1.47 U1.49 U2.1 U2.9 U2.11 U2.18 U2.25 U3.1 Y1.2 Y1.4 | length 37
  L1 (SIGNAL) w0.25: C17.1@86.575,87.375 C17.1 ; C16.1 87.5,85.25 87.95,85.7 88.475,85.7 U2.11 ; C17.1@86.8,87.5 87.55,86.75 U2.9 ; C9.1 95.281,76 95.62,76.339 U1.8 ; U1.47 97.318,81.068 97.5,81.25 ; U1.23 101.818,73.146 101.964,73 102,73 ; U1.35 103.589,79.339 103.75,79.5
  L1 (SIGNAL) w0.3: 97.5,81.25 97.5,81.5 ; 102,72.75 102,73 ; 103.75,79.5 104,79.75 104.25,79.75
  L1 (SIGNAL) w0.4: 97.5,81.5 97.5,81.75 ; 102,72.25 102,72.75
  L1 (SIGNAL) w0.45: 104.25,79.75 C11.1
  L1 (SIGNAL) w0.5: v2(85.75,87.25) 85.777,87.25 86.027,87.5 C17.1@86.7,87.5 ; v2(86,84.75) 86.019,84.769 86.219,84.769 86.7,85.25 C16.1 ; v2(88,71.75) Y1.4@88.75,71.75 ; v2(88,73.75) C5.2 ; v2(90,61.25) 90.5,61.25 ; C15.1 v2(91,83.25) ; v2(90.75,78.75) C7.2 C8.1 ; Y1.2@91.75,70.25 v2(92.5,70.25) ; C6.2 92.5,73.75 v2(93.25,74.5) 93.269,74.519 93.269,75.519 93.75,76 C9.1@94.7,76 ; C18.1@94.25,84.75 v2(95,84.75) ; v2(96.75,83.25) 96.769,83.231 96.769,83.204 97.5,82.473 C12.1 97.5,81.75 ; v2(98.25,84.75) R6.2@99,84.75 ; v2(99.25,70.75) C13.2@99.25,71.5 ; 102,72.25 102,72.05 102.25,71.8 C10.1 ; v2(102.25,71) C10.1@102.25,71.5 ; C3.2@105.75,68.75 v2(106.5,68.75) ; v2(106.5,89.25) C14.1 C14.1@107.5,89.2 ; U3.1@107,66.75 v2(107,67.5) ; v2(107.758,88) 107.88,87.878 J3.5 ; v2(108.5,70) C2.2@108.5,70.75 ; C4.2@109.5,64.25 v2(109.5,65) ; v2(110.75,70) 110.731,70.019 110.731,70.809 C1.2@110.75,70.809 ; v2(112,66.5) 112.019,66.481 112.019,65.981 112.086,65.914 R1.2@112.086,65.766 ; v2(112.25,79.75) 112.277,79.75 112.327,79.7 J1.5@113.56,79.7
  other v1: 87,62 89,62 95,62 97,62 113,62 86,64 88,64 90,64 92,64 98,64 102,64 108,64 112,64 114,64 116,64 85,66 87,66 93,66 109,66 111,66 115,66 88,68 90,68 108,68 110,68 112,68 114,68 116,68 87,70 101,70 107,70 113,70 115,70 94,72 114,72 116,72 107,74 113,74 115,74 88,76 106,76 87,78 89,78 106,80 110,80 108,84 116,84 95,86 97,86 113,86 104,88 112,88 114,88 116,88 103,90 113,90
  other v2: 99.5,68.5
  other v3: 97.368,74.889 98.468,74.889 99.568,74.889 100.668,74.889 101.768,74.889 97.368,75.989 98.468,75.989 99.568,75.989 100.668,75.989 101.768,75.989 97.368,77.089 98.468,77.089 99.568,77.089 100.668,77.089 101.768,77.089 97.368,78.189 98.468,78.189 99.568,78.189 100.668,78.189 101.768,78.189 97.368,79.289 98.468,79.289 99.568,79.289 100.668,79.289 101.768,79.289 89.95,85.95 91.05,85.95 89.95,87.05 91.05,87.05
IMU_CPOUT: C18.2 U2.20 | length 1.5
  L1 (SIGNAL) w0.3: U2.20 C18.2
IMU_INT: U1.45 U2.12 | length 18.9
  L1 (SIGNAL) w0.25: U2.12 88.275,85.25 88.225,85.2 88.225,84.95 88.025,84.75 88,84.75 87,83.75 87,82.5 88,81.5 92.5,81.5 94.6,83.6 95.416,83.6 95.641,83.825 97.175,83.825 98.318,82.682 U1.45
IMU_REGOUT: C16.2 U2.10 | length 1.8
  L1 (SIGNAL) w0.3: C16.2 U2.10
IMU_SCL: R3.1 U1.42 U2.23 | length 18
  L1 (SIGNAL) w0.25: U2.23 93.25,87.25 93.75,87.25 94.25,86.75 v4(98,86.75) ; U1.42 99.818,82.068 101.5,83.75 101.5,86.248 R3.1 R3.1 101.499,87.999 v4(101.5,88)
  L4 (SIGNAL) w0.25: v4(98,86.75) 99.25,88 v4(101.5,88)
IMU_SDA: R2.1 U1.43 U2.24 | length 15.1
  L1 (SIGNAL) w0.25: U2.24 99.5,87.75 100.12,87.13 ; U1.43 99.318,82.568 100.386,83.636 100.386,86.139 100.275,86.25 R2.1
  L1 (SIGNAL) w0.3: 100.12,87.13 100.12,86.336 100.206,86.25 R2.1
LED_PWR_K: D1.1 R1.1
MCU_BOOT0: R6.1 U1.44 | length 3.6
  L1 (SIGNAL) w0.25: U1.44 98.818,82.932 98.75,83 98.75,83.5 98.889,83.639 98.889,83.889 R6.1
MCU_LED_A: D2.2 U1.26 | length 1.7
  L1 (SIGNAL) w0.25: U1.26 103.379,74.839 103.693,75.153 103.693,75.179 103.839,75.325 104.175,75.325 104.3,75.45 D2.2
MCU_LED_k: D2.1 R4.1 | length 1.8
  L1 (SIGNAL) w0.25: R4.1 105.163,73.787 105.163,75.463 D2.1
MCU_NRST: C14.2 J3.3 R5.2 U1.7 | length 35.1
  L1 (SIGNAL) w0.25: v2(93.25,76.5) 93.25,76.839 U1.7 ; v4(106.9,91.4) 108,91.4 108.5,90.9 C14.2 R5.2 109.83,89.25 109.23,88.65 J3.3
  L4 (SIGNAL) w0.25: v2(93.25,76.5) 93.25,78.95 96.1,81.8 102.7,81.8 105.5,84.6 105.5,90.5 106.314,91.314 106.814,91.314 v4(106.9,91.4)
MCU_OSC_IN: C5.1 U1.5 Y1.1 | length 9.9
  L1 (SIGNAL) w0.25: C5.1 89.75,76.75 90.839,77.839 93.316,77.839 93.319,77.842 94.065,77.842 94.068,77.839 U1.5
MCU_OSC_OUT: R7.2 U1.6 | length 5.4
  L1 (SIGNAL) w0.25: R7.2 92,76.75 92.589,77.339 U1.6
MCU_PA4: J2.2 U1.14 | length 11.4
  L1 (SIGNAL) w0.25: J2.2 94,64.45 94,71 95.75,72.75 96.79,72.75 97.318,73.278 U1.14
MCU_PA5: J2.3 U1.15 | length 10.8
  L1 (SIGNAL) w0.25: J2.3 95.5,64.45 95.5,71.5 96.25,72.25 97,72.25 97.818,73.068 U1.15
MCU_PA6: J2.4 U1.16 | length 10.1
  L1 (SIGNAL) w0.25: J2.4 96.625,71.125 98.318,72.818 U1.16
MCU_PA7: J2.5 U1.17 | length 14.6
  L1 (SIGNAL) w0.25: J2.5 98.5,61 99,61 99.75,61.75 99.75,65.25 98,67 98,71.81 98.818,72.628 U1.17
MCU_SWCLK: J3.4 U1.37 | length 10.4
  L1 (SIGNAL) w0.25: U1.37 102.318,80.764 103.554,82 104.75,82 106,83.25 108.25,83.25 109.23,84.23 J3.4
MCU_SWDIO: J3.2 U1.34 | length 12.8
  L1 (SIGNAL) w0.25: U1.34 107.339,78.839 110.5,82 J3.2
MCU_SWO: J3.6 U1.39 | length 10.1
  L1 (SIGNAL) w0.25: U1.39 101.318,81.568 102.75,83 104,83 105.25,84.25 107.25,84.25 107.75,84.75 107.75,85.624 107.96,85.834 J3.6
MCU_VCAP1: C13.1 U1.22 | length 2.2
  L1 (SIGNAL) w0.25: 101.25,73 101.318,73.068 U1.22
  L1 (SIGNAL) w0.3: 101,72.75 101.25,73
  L1 (SIGNAL) w0.4: 100.75,72.5 101,72.75
  L1 (SIGNAL) w0.5: C13.1 100.75,72.5
USB_D_N: J1.2 U1.32 | length 11.1
  L1 (SIGNAL) w0.26: U1.32 103.233,77.839 103.251,77.857 108.472,77.857 108.486,77.843 113.907,77.843 J1.2
USB_D_P: J1.3 U1.33 | length 11.1
  L1 (SIGNAL) w0.26: U1.33 103.233,78.339 103.251,78.321 108.664,78.321 108.678,78.307 113.907,78.307 J1.3
VBUS: C1.1 FB1.1 J1.1
XTAL_IN: C6.1 R7.1 Y1.3
pads on no net: J1.4 J1.6 J1.7 J1.8 J1.9 J1.10 J1.11 J3.0 U1.2 U1.3 U1.4 U1.10 U1.11 U1.12 U1.13 U1.18 U1.19 U1.20 U1.21 U1.25 U1.27 U1.28 U1.29 U1.30 U1.31 U1.38 U1.40 U1.41 U1.46 U2.2 U2.3 U2.4 U2.5 U2.6 U2.7 U2.14 U2.15 U2.16 U2.17 U2.19 U2.21 U2.22
copper on no net: | length 136
  L1 (SIGNAL) w0.254: 84.635,93 116,93 116.73,93 cw(c116.73,91.73) 118,91.73 118,61 cw(c115.586,61) 117.293,59.293 cw(c116.586,60) 116.586,59 84.27,59 cw(c84.27,60.27) 83,60.27 83,91.73 cw(c84.27,91.73) 84.27,93 85,93

## Polygon pours and split planes (outlines as drawn)
+3V3 on L1 (SIGNAL) "+3V3_L01_P002" (solid, pour order 2): 102.9,59.3 106.7,59.3 106.7,60.6 106.7,61.6 108.6,61.7 110.6,61.7 110.6,63.1 107.1,63.1 105.4,64.8 105.4,67.1 104.3,67.1 104.2,67.1 103.9,67.1 103.9,62.4 102.9,61.4
+5V on L1 (SIGNAL) "+5V_L01_P001" (solid, pour order 1): 107.6,73.7 104,70.1 103.2,70.1 102.9,69.8 102.9,68 102.6,68 101.8,67.2 101.8,65.8 103,65.8 103.2,66 103.2,66.8 104.1,67.7 104.4,67.7 104.4,69.4 106.7,71.7 109.5,71.7 109.5,75.8 107.7,75.8 107.6,75.7
VBUS on L1 (SIGNAL) "VBUS_L01_P000" (solid, pour order 0): 114.8,77.4 111.5,77.4 109.7,75.6 109.7,71.7 111.7,71.7 111.7,75.3 113.2,76.8 114.8,76.8
GND on L2 (GND) "GND_L02_P003" (solid, pour order 3): 83.533,77.902 83.533,91.092 cw(c85.022,91.092) 85.022,92.582 116.367,92.582 cw(c116.367,91.376) 117.573,91.376 117.573,60.573 cw(c117,60.573) 117,60 ccw(c117,59.864) 116.864,59.864 116.864,59.605 cw(c116.757,59.605) 116.757,59.499 83.539,59.499
GND on L3 (GND) "GND_L03_P004" (solid, pour order 4): 83.533,77.902 83.533,91.092 cw(c85.022,91.092) 85.022,92.582 116.367,92.582 cw(c116.367,91.376) 117.573,91.376 117.573,60.573 cw(c117,60.573) 117,60 ccw(c117,59.864) 116.864,59.864 116.864,59.605 cw(c116.757,59.605) 116.757,59.499 83.539,59.499

## Silkscreen, mask and mechanical layers (free items; w line width, h text height)
Top Overlay:
  text "SWD" at 106.004,82.254 h1.52
  text "USB" at 113.254,71.754 h1.52
  text "ASURTLV" at 109.625,67.625 h1
  text "GPIO" at 93.225,66 h1.25
Mechanical 1:
  lines w0.254: -162.394,5.375 -162.394,52.887 cw(c-159.769,52.762) -159.644,55.387 -114.625,55.387 ; -162.393,5.425 ccw(c-159.769,5.279) -159.894,2.654 ; -159.875,2.649 -114.883,2.649 ccw(c-114.758,5.274) -112.133,5.149 -112.133,52.625 ; -114.625,55.375 cw(c-114.75,52.75) -112.125,52.625 ; 27.856,25.625 27.856,73.137 cw(c30.481,73.012) 30.606,75.637 75.625,75.637 ; 27.857,25.676 ccw(c30.481,25.529) 30.356,22.904 ; 28.856,9.625 28.856,57.137 cw(c31.481,57.012) 31.606,59.637 76.625,59.637 ; 28.857,9.676 ccw(c31.481,9.529) 31.356,6.904 ; 30.375,22.899 75.367,22.899 ccw(c75.492,25.524) 78.117,25.399 78.117,72.875 ; 31.375,6.899 76.367,6.899 ccw(c76.492,9.524) 79.117,9.399 79.117,56.875 ; 75.625,75.625 cw(c75.5,73) 78.125,72.875 ; 76.625,59.625 cw(c76.5,57) 79.125,56.875 ; 108.856,29.625 108.856,77.137 cw(c111.481,77.012) 111.606,79.637 156.625,79.637 ; 108.857,29.676 ccw(c111.481,29.529) 111.356,26.904 ; 111.375,26.899 156.367,26.899 ccw(c156.492,29.524) 159.117,29.399 159.117,76.875 ; 156.625,79.625 cw(c156.5,77) 159.125,76.875